# Altium PCB RheoBoard_V9.PcbDoc (part 1 of 2)
Units mm, origin at the board's own origin, x right, y up, seen from the top; angles counter-clockwise.
Board outline 100.09 x 99.96 mm, 2 copper layers (Top Layer, Bottom Layer), stack 1.58 mm thick; 125 components, 62 nets, 325 pads, 495 vias.
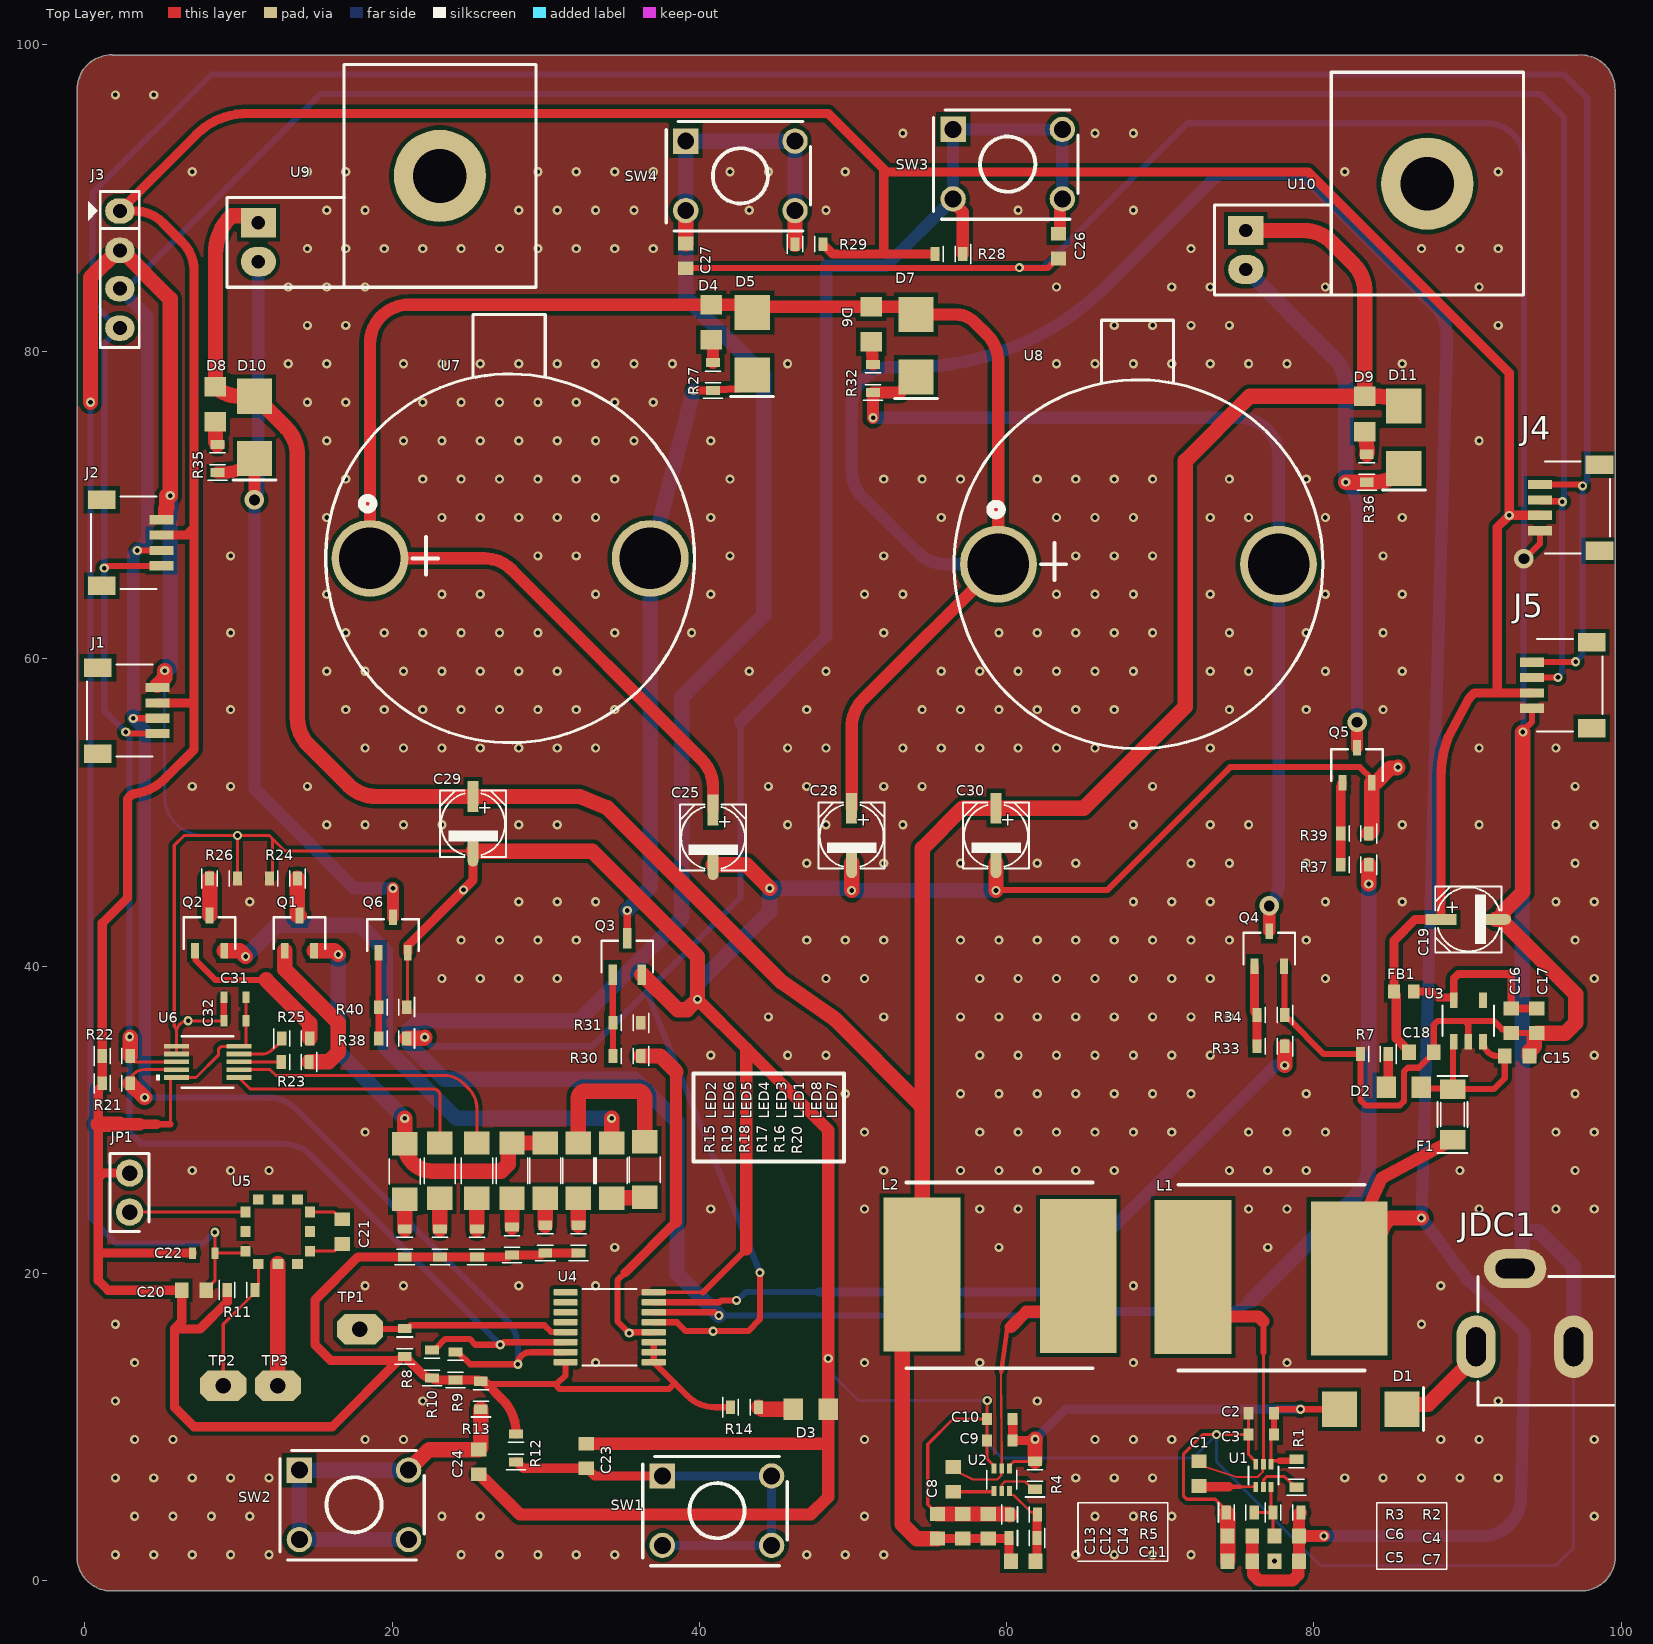
[diagram p0: Top Layer view]
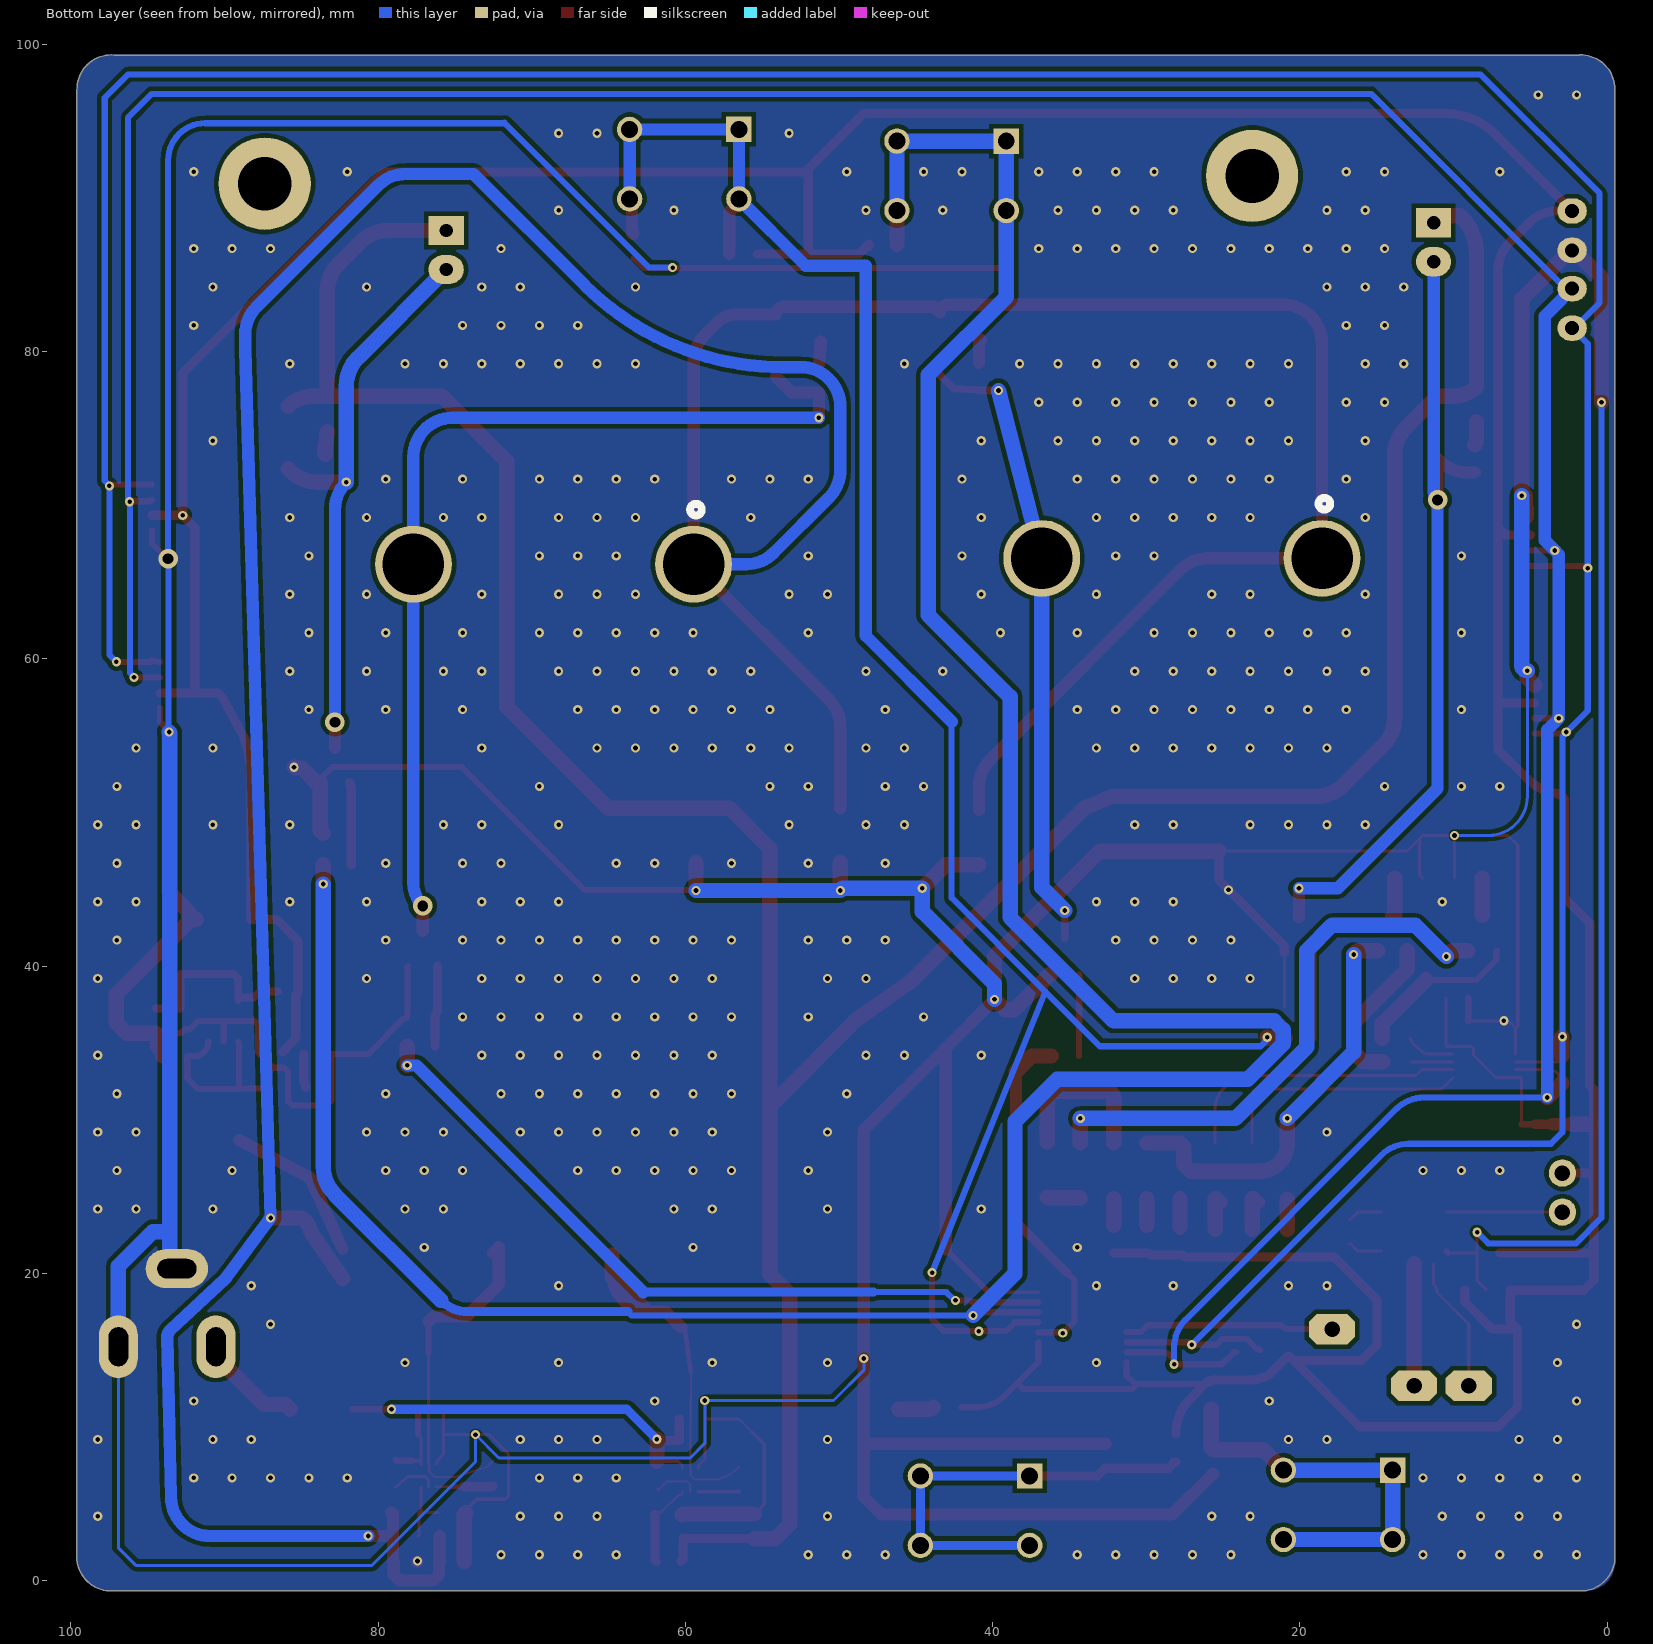
[diagram p1: Bottom Layer view, seen from below]
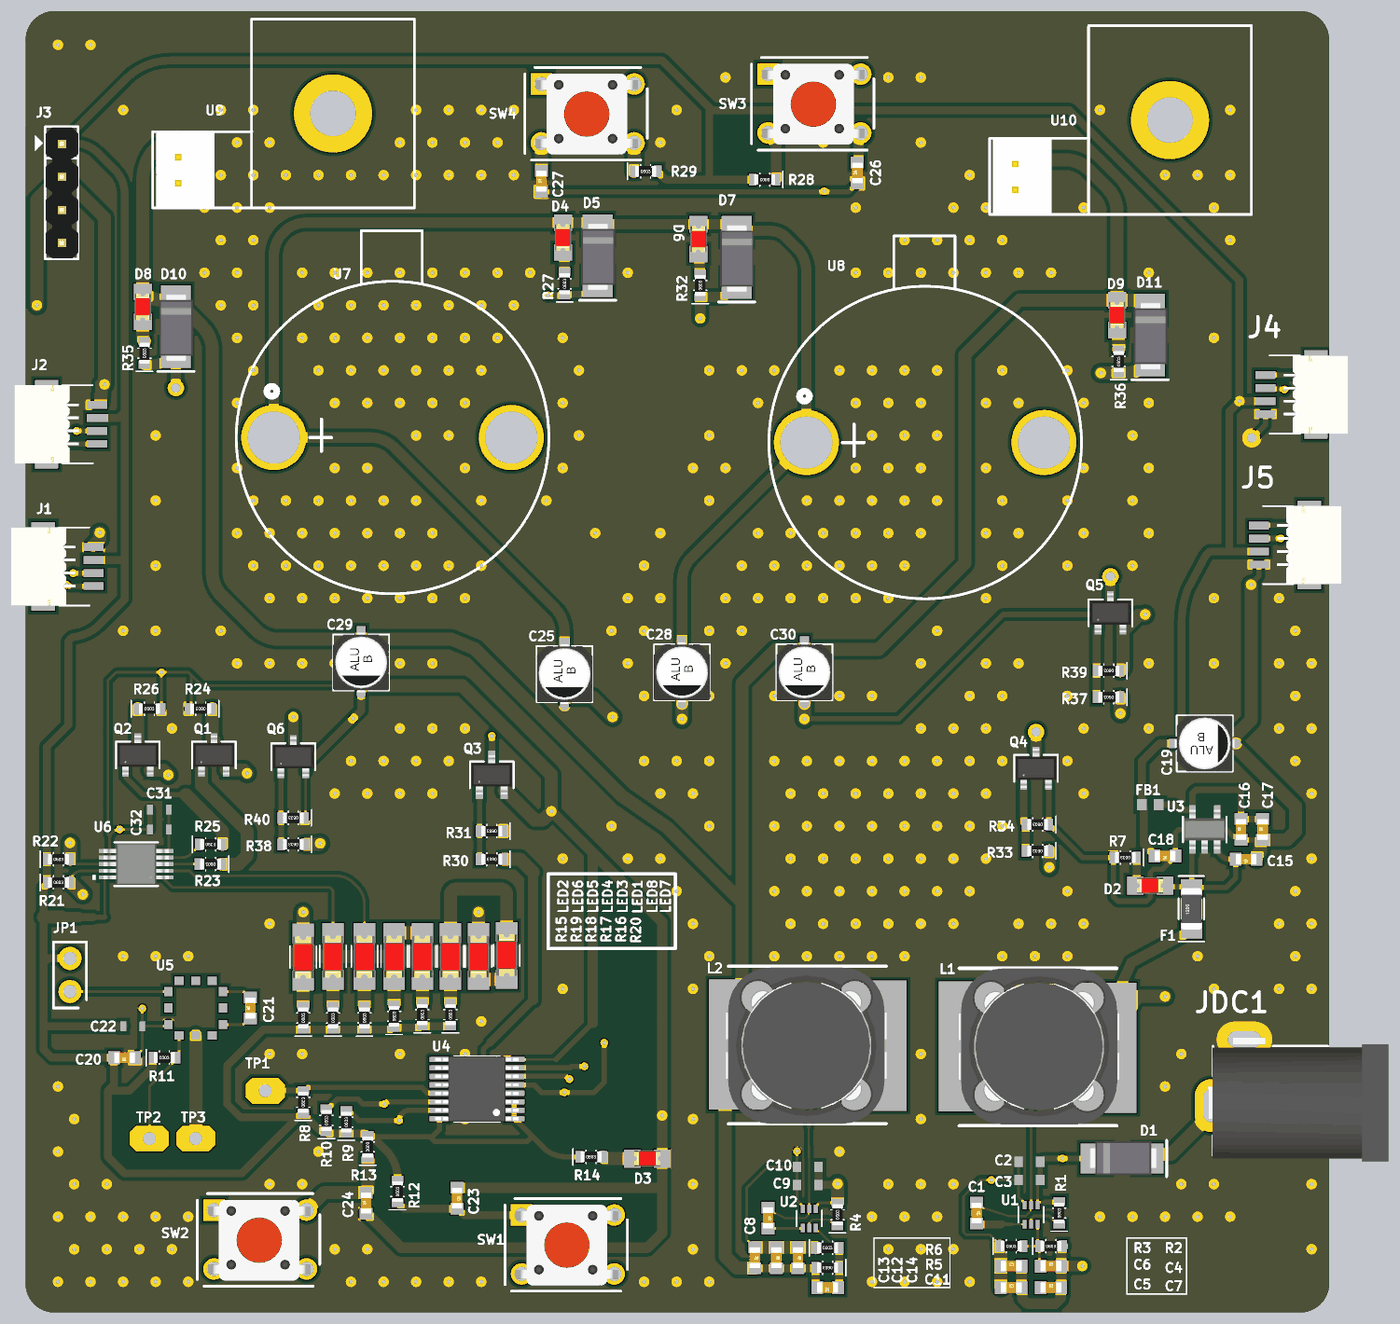
[diagram p3: 3D render of the assembled board from above, using the file's embedded part models]

## Layer stack, top to bottom
Top Solder: solder mask 0.01, SM-001, Dk 4
Top Layer: signal copper 0.035
Dielectric 1: dielectric 1.51, FR-4, Dk 4.8
Bottom Layer: signal copper 0.035
Bottom Solder: solder mask 0.01, SM-001, Dk 4

## Board outline
-0.491,1.639 -0.484,96.889 cw(c1.738,97.08) 1.802,99.309 1.809,99.302 97.172,99.302 cw(c97.362,97.08) 99.592,97.016 99.592,1.766 cw(c97.369,1.576) 97.306,-0.654 97.299,-0.647 1.929,-0.647 cw(c1.738,1.576)

## Design rules (kind name [scope] priority, off if disabled: settings)
BoardOutlineClearance [All] p1: gap=0 ignorepadtopadclearanceinfootprint=FALSE
Clearance "Stitching GND" [IsStitchingVia and InNet('GND') vs (IsVia and (Not IsStitchingVia)) Or IsPad] p1: gap=0.5 ignorepadtopadclearanceinfootprint=TRUE
Clearance Clearance_1 [All] p2: gap=0.23 ignorepadtopadclearanceinfootprint=TRUE
ComponentOrientations [All] p1: allowedrotations=1
Creepage [All] p1: checkdistance=0.254 applytopolygonpour=TRUE
HoleSize [All] p1: absolutevalues=TRUE maxlimit=10 minlimit=0.025 maxpercent=80.000 minpercent=20.000
HoleToHoleClearance [All] p1: gap=0.25 allowstackedmicrovias=TRUE
MinimumAnnularRing [All] p1: minimumring=0.1
MinimumSolderMaskSliver [All] p1: minsoldermaskwidth=0.1
NetsToIgnore [All] p1:
PermittedLayers [All] p1: toplayerpermitted=TRUE bottomlayerpermitted=TRUE
PolygonConnect [All] p1: connectstyle=Direct reliefconductorwidth=0.254 reliefentries=4 polygonreliefangle="90 Angle" airgapwidth=0.254
RoutingVias [All] p1: holewidth=0.3 width=0.6 viastyle="Through Hole" minholewidth=0.3 minwidth=0.6 maxholewidth=1.5 maxwidth=3
SilkToSilkClearance [All] p1: silktosilkclearance=0.15
SilkToSolderMaskClearance [IsPad] p1: minsilkscreentomaskgap=0.15 clearancetoexposedcopper=TRUE
SolderMaskExpansion [All] p1: expansion=0.102 istentingtop=FALSE
SupplyNets "Schematic Supply Nets" [InNet('6V')] p1: voltage=0.000
SupplyNets "Schematic Supply Nets_8" [InNet('VIN')] p2: voltage=0.000
SupplyNets "Schematic Supply Nets_7" [InNet('4V5')] p3: voltage=0.000
SupplyNets "Schematic Supply Nets_6" [InNet('4V5A')] p4: voltage=0.000
SupplyNets "Schematic Supply Nets_5" [InNet('3V3')] p5: voltage=0.000
SupplyNets "Schematic Supply Nets_4" [InNet('GND')] p6: voltage=0.000
SupplyNets "Schematic Supply Nets_3" [InNet('+12')] p7: voltage=0.000
SupplyNets "Schematic Supply Nets_1" [InNet('D3V3')] p8: voltage=0.000
Width [All] p1: maxlimit=1 minlimit=0.15 preferedwidth=0.2
25 further rules are at their usual default settings.

## Classes and differential pairs
component class U_POWER: 0.7 C1 C2 C3 C5 C6 C7 C8 C9 C10 C11 C12 C13 C14 C15 C16 C17 C18 C19 D1 D2 F1 FB1 JDC1 L1 L2 R1 R2 R3 R4 R5 R6 R7 U1 U2 U3
component class U_PERIPHERAL: C25 C26 C27 C28 C29 C30 D4 D5 D6 D7 D8 D9 D10 D11 Q3 Q4 Q5 Q6 R27 R28 R29 R30 R31 R32 R33 R34 R35 R36 R37 R38 R39 R40 SW3 SW4 U7 U8 U9 U10
component class U_MCU: C20 C21 C22 C23 C24 C31 C32 D3 J1 J2 J3 J4 J5 JP1 LED1 LED2 LED3 LED4 LED5 LED6 LED7 LED8 Q1 Q2 R8 R9 R10 R11 R12 R13 R14 R15 R16 R17 R18 R19 R20 R21 R22 R23 R24 R25 R26 SW1 SW2 TP1 TP2 TP3 U4 U5 U6

## Components (designator, comment, footprint, x,y, rotation, side; value= is the part's Value field where it differs from the comment)
C1 "100nF" CN-SMD-0603 72.517,6.985 r270 top value=100n
C2 "10uF" CAP_CL10_SAM 76.581,10.922 r0 top
C3 "10uF" CAP_CL10_SAM 76.581,9.525 r0 top value=10u
C4 "100nF" CN-SMD-0603 78.232,2.921 r0 top
C5 "22uF" CN-SMD-0603 75.184,1.27 r0 top value=22u
C6 "22uF" CN-SMD-0603 75.184,2.921 r0 top value=22u
C7 "22uF" CN-SMD-0603 78.232,1.27 r0 top value=22u
C8 "100nF" CN-SMD-0603 56.515,6.604 r270 top value=100n
C9 "10uF" CAP_CL10_SAM 59.563,9.144 r0 top value=10u
C10 "10uF" CAP_CL10_SAM 59.563,10.541 r0 top
C11 "100nF" CN-SMD-0603 61.087,1.27 r180 top value=100n
C12 "22uF" CN-SMD-0603 57.15,3.556 r270 top value=22u
C13 "22uF" CN-SMD-0603 55.499,3.556 r270 top value=22u
C14 "22uF" CN-SMD-0603 58.801,3.556 r270 top
C15 "10u" CN-SMD-0603 93.218,34.163 r180 top
C16 "100n" CN-SMD-0603 92.837,36.449 r90 top
C17 "10u" CN-SMD-0603 94.488,36.449 r90 top
C18 "10u" CN-SMD-0603 86.995,34.417 r180 top
C19 "CAP ALUM 100UF 20% 16V SMD" CAP-ALU-SMD-5.5x5.5 90.043,43.053 r0 top value=100uF
C20 "100nF" CN-SMD-0603 7.112,18.923 r180 top
C21 "1nF" CN-SMD-0603 16.764,22.733 r90 top
C22 "100nF" CAP_CL10_SAM-L 7.747,21.336 r180 top
C23 "100nF" CN-SMD-0603 32.639,8.128 r270 top
C24 "100nF" CN-SMD-0603 25.654,7.747 r90 top
C25 "CAP ALUM 100UF 20% 16V SMD" CAP-ALU-SMD-5.5x5.5 40.894,48.387 r270 top value="100u, 16v"
C26 "100nF" CN-SMD-0603 63.373,86.868 r90 top
C27 "100nF" CN-SMD-0603 39.116,86.233 r90 top
C28 "CAP ALUM 100UF 20% 16V SMD" CAP-ALU-SMD-5.5x5.5 49.911,48.514 r270 top value="100u, 16v"
C29 "CAP ALUM 100UF 20% 16V SMD" CAP-ALU-SMD-5.5x5.5 25.273,49.276 r270 top value="100u, 16v"
C30 "CAP ALUM 100UF 20% 16V SMD" CAP-ALU-SMD-5.5x5.5 59.309,48.514 r270 top value="100u, 16v"
C31 "1uF" CAP_CL10_SAM-L 9.779,37.973 r0 top
C32 "100nF" CAP_CL10_SAM-L 9.779,36.449 r0 top
D1 "SS34" DIO-SMD-106 83.693,11.176 r0 top
D2 "LED Red" LED-0805-Red 86.995,32.131 r180 top value="LED PWR"
D3 "LED Red" LED-0805-Red 46.101,11.176 r0 top
D4 "LED Red" LED-0805-Red 40.767,83.058 r270 top
D5 "SS34" DIO-SMD-106 43.434,80.518 r270 top
D6 "LED Red" LED-0805-Red 51.181,82.931 r270 top
D7 "SS34" DIO-SMD-106 54.102,80.391 r270 top
D8 "LED Red" LED-0805-Red 8.509,77.724 r270 top
D9 "LED Red" LED-0805-Red 83.312,77.089 r270 top
D10 "SS34" DIO-SMD-106 11.052,75.069 r270 top
D11 "SS34" DIO-SMD-106 85.852,74.422 r270 top
F1 "C1F5" RES-SMD-1206 89.027,30.353 r90 top
FB1 "330" IND_BLM18KG331WH1D_MUR-L 85.852,38.354 r180 top
J1 "PRT-14417" SPARKFUN_PRT-14417 2.286,56.642 r270 top
J2 "PRT-14417" SPARKFUN_PRT-14417 2.54,67.564 r270 top
J3 "Jumper 4" JP4 2.286,86.614 r270 top value=J3
J4 "PRT-14417" SPARKFUN_PRT-14417 97.155,69.85 r90 top
J5 "PRT-14417" SPARKFUN_PRT-14417 96.647,58.293 r90 top
JDC1 "Jac DC 5521" DC0 93.726,17.78 r180 top value="Jac DC"
JP1 "JP2" JP2-CLOSED 2.921,24.003 r180 top value="Connector 2"
L1 "4.7uH" Inductor_SMD 83.296,13.685 r90 top value=4.7u
L2 "2.2uH" Inductor_SMD 53.483,25.939 r270 top value=4.7u
LED1 "LED" LED-1206-Red 32.131,24.892 r90 top value="LED 3 ly Single Colour"
LED2 "LED" LED-1206-Red 20.828,24.841 r90 top value="LED 3 ly Single Colour"
LED3 "LED" LED-1206-Red 29.972,24.892 r90 top value="LED 3 ly Single Colour"
LED4 "LED" LED-1206-Red 27.813,24.892 r90 top value="LED 3 ly Single Colour"
LED5 "LED" LED-1206-Red 25.527,24.892 r90 top value="LED 3 ly Single Colour"
LED6 "LED" LED-1206-Red 23.114,24.892 r90 top value="LED 3 ly Single Colour"
LED7 "LED" LED-1206-Red 36.449,28.575 r270 top value="LED 3 ly Single Colour"
LED8 "LED" LED-1206-Red 34.29,24.892 r90 top value="LED 3 ly Single Colour"
Q1 "AO3400A" SOT-23-3L_AOS-L 13.97,42.164 r0 top
Q2 "AO3400A" SOT-23-3L_AOS-L 8.128,42.164 r0 top
Q3 "AO3400A" SOT-23-3L_AOS 35.306,40.64 r0 top
Q4 "AO3400A" SOT-23-3L_AOS-L 77.089,41.148 r0 top
Q5 "AO3400A" SOT-23-3L_AOS-L 82.804,53.086 r0 top
Q6 "AO3400A" SOT-23-3L_AOS-L 20.066,42.037 r0 top
R1 "RES 100K 5% 1/10W 0603" RES-SMD-0603 78.867,6.985 r90 top value=100K
R2 "197K" RES-SMD-0603 78.232,4.445 r0 top
R3 "30K" RES-SMD-0603 75.184,4.445 r0 top value=30k
R4 "RES 100K 5% 1/10W 0603" RES-SMD-0603 61.849,6.858 r90 top value=100K
R5 "270K" RES-SMD-0603 61.087,2.794 r180 top
R6 "30k" RES-SMD-0603 61.087,4.318 r0 top
R7 "1K" RES-SMD-0603 83.947,34.29 r180 top
R8 "2.2K" RES-SMD-0603 20.828,15.494 r90 top
R9 "4.7K" RES-SMD-0603 24.13,13.97 r90 top
R10 "4.7K" RES-SMD-0603 22.606,14.097 r90 top
R11 "10K" RES-SMD-0603 10.16,18.923 r0 top
R12 "10k" RES-SMD-0603 28.067,8.636 r90 top
R13 "10k" RES-SMD-0603 25.781,12.065 r90 top
R14 "1K" RES-SMD-0603 42.926,11.303 r0 top
R15 "1K" RES-SMD-0603 20.828,21.971 r90 top
R16 "1K" RES-SMD-0603 29.972,22.225 r90 top
R17 "1K" RES-SMD-0603 27.813,22.098 r90 top
R18 "1K" RES-SMD-0603 25.527,21.971 r90 top
R19 "1K" RES-SMD-0603 23.114,21.971 r90 top
R20 "1.2K" RES-SMD-0603 32.131,22.225 r90 top
R21 "10K" RES-SMD-0603 2.032,32.385 r0 top
R22 "10K" RES-SMD-0603 2.032,34.163 r0 top
R23 "100R" RES-SMD-0603 13.716,33.782 r180 top
R24 "100K" RES-SMD-0603 12.954,45.72 r180 top
R25 "100R" RES-SMD-0603 13.716,35.306 r0 top
R26 "100K" RES-SMD-0603 9.017,45.72 r0 top
R27 "RES 1K 5% 1/10W 0603" RES-SMD-0603 40.894,78.359 r90 top value=1K
R28 "10k" RES-SMD-0603 56.261,86.36 r180 top
R29 "10k" RES-SMD-0603 47.117,86.995 r0 top
R30 "RES 100R 5% 1/10W 0603" RES-SMD-0603 35.306,34.163 r180 top value=100R
R31 "RES 10K 5% 1/10W 0603" RES-SMD-0603 35.306,36.322 r180 top value=10K
R32 "RES 1K 5% 1/10W 0603" RES-SMD-0603 51.308,78.232 r90 top value=1K
R33 "RES 100R 5% 1/10W 0603" RES-SMD-0603 77.216,34.798 r180 top value=100R
R34 "RES 10K 5% 1/10W 0603" RES-SMD-0603 77.216,36.83 r180 top value=10K
R35 "RES 1K 5% 1/10W 0603" RES-SMD-0603 8.636,73.025 r90 top value=1K
R36 "RES 1K 5% 1/10W 0603" RES-SMD-0603 83.439,72.39 r90 top value=1K
R37 "RES 100R 5% 1/10W 0603" RES-SMD-0603 82.677,46.609 r180 top value=100R
R38 "RES 100R 5% 1/10W 0603" RES-SMD-0603 20.066,35.306 r180 top value=100R
R39 "RES 10K 5% 1/10W 0603" RES-SMD-0603 82.677,48.641 r180 top value=10K
R40 "RES 10K 5% 1/10W 0603" RES-SMD-0603 20.066,37.338 r180 top value=10K
SW1 "SW2" "BUTTON 4 PIN" 41.148,4.572 r0 top
SW2 "SW2" "BUTTON 4 PIN" 17.526,4.953 r0 top
SW3 "SW2" "BUTTON 4 PIN" 60.071,92.202 r0 top
SW4 "SW2" "BUTTON 4 PIN" 42.672,91.44 r0 top
TP1 "1" "TP - 2" 17.907,16.383 r0 top
TP2 "1" "TP - 2" 9.017,12.7 r0 top
TP3 "1" "TP - 2" 12.573,12.7 r0 top
U1 "TI TPS563203DRLR" SOT50P160X60-6N 76.708,6.858 r270 top
U2 "TI TPS563203DRLR" SOT50P160X60-6N 59.682,6.577 r270 top
U3 "AP2112K-3.3TRG1" SOT_RG1_DIO 90.043,36.449 r90 top value=1K
U4 "TCA9534APWR" SOP65P640X120-16N 34.163,16.51 r180 top
U5 "MPRLS0025PA00001A" XDCR_MPRLS0025PA00001A 12.573,22.733 r0 top
U6 "PCA9632DP2,118" TSSOP10_3P1X3P1_NXP 8.001,33.782 r180 top
U7 "PUMP" Pump 27.686,66.421 r0 top
U8 "PUMP" Pump 68.58,66.04 r0 top
U9 "VALVE" VALVE 23.114,91.44 r0 top
U10 "VALVE2" VALVE 87.376,90.932 r0 top

## Footprints (in the part's own frame and the unit in brackets; to place one, negate y for a bottom-side part, rotate by r counter-clockwise, add the part's x,y. Pads: shape width x height; smd on the part's side, far side on the other; paste and mask are expansions set on the pad)
"BUTTON 4 PIN" [mil] "BUTTON SMORE 280mil x 178mil"
  rect 65x65 hole 43.31: 1(-140,89)
  round 65 hole 43.31: 1(140,89) 2(-140,-89) 2(140,-89)
  silkscreen extent -190,-141 180,139, body extent -159,-124 153,120, height 276
CAP-ALU-SMD-5.5x5.5 [mm]
  rect 2x0.7 smd: 1(-1.778,0)
  oval 2x0.7 smd: 2(1.778,0)
  silkscreen extent -2.15,-2.15 2.15,2.15, body extent -2.3,-2.15 2.3,2.15, height 5.4
CAP_CL10_SAM [mm]
  rect 0.656x0.8 smd paste+0 mask+0: 1(-0.828,0) 2(0.828,0)
CAP_CL10_SAM-L [mm]
  rect 0.452x0.749 smd paste+0 mask+0: 1(-0.726,0) 2(0.726,0)
CN-SMD-0603 [mm]
  rect 0.9x1 smd: 1(-0.8,0) 2(0.8,0)
  body extent -0.8,-0.4 0.8,0.4, height 0.3
DC0 [mil] "Jac DC input"
  oval 100x160 hole 50 slot 100 at 90 deg: 1(125,100) 2(-125,100)
  oval 160x100 hole 50 slot 100 at 0 deg: 3(25,-100)
  silkscreen extent -227,-80 120,250, body extent -410,-105 134,269, height 434
DIO-SMD-106 [mil]
  rect 90x90.55 smd: 1(80,0) 2(-80,0)
  silkscreen extent 135,-55 135,55, body extent -99,-50 106,52, height 95
IND_BLM18KG331WH1D_MUR-L [mm]
  rect 0.76x0.89 smd paste+0 mask+0: 1(-0.647,0) 2(0.647,0)
Inductor_SMD [mm]
  rect 10x5 smd: 1(6.096,11.176) 2(6,1)
  silkscreen extent 0,0 12.1,12.1, body extent 0.1,-0.2 12.1,12.14, height 7.15
JP2-CLOSED [mil]
  round 70 hole 40: 1(0,0) 2(0,-100)
  silkscreen extent -50,-150 50,50, body extent -50,-152 50,50, height 300
JP4 [mil] "Jumper 4"
  oval 65x75 hole 36: 1(-100,0) 2(1,0) 3(99,0) 4(200,0)
  silkscreen extent -150,-81 250,50, body extent -148,-48 248,50, height 323
LED-0805-Red [mil]
  rect 50x55 smd: 1(0,0) 2(90,0)
  body extent 5,-25 85,25, height 43
LED-1206-Red [mil]
  rect 60x65 smd: 1(0,0) 2(142,0)
  silkscreen extent 38,-40 104,40, body extent 7,-31 133,32, height 43
Pump [mm]
  round 5 hole 4: 1(-9.12,0.127) 2(9.12,0.127)
  silkscreen extent -12,-11.87 12,16
RES-SMD-0603 [mm]
  rect 0.6x0.9 smd: 1(-0.889,0) 2(0.927,0)
  silkscreen extent -1.4,-0.64 0.38,0.63, body extent -0.8,-0.4 0.8,0.4, height 0.43
RES-SMD-1206 [mil]
  rect 50x65 smd: 1(-65,0) 2(65,0)
  silkscreen extent -99,-38 99,39, body extent -63,-31 63,32, height 40
SOP65P640X120-16N [mm]
  rrect25% 1.57x0.41 smd: 1(-2.87,2.275) 2(-2.87,1.625) 3(-2.87,0.975) 4(-2.87,0.325) 5(-2.87,-0.325) 6(-2.87,-0.975) 7(-2.87,-1.625) 8(-2.87,-2.275) 9(2.87,-2.275) 10(2.87,-1.625) 11(2.87,-0.975) 12(2.87,-0.325) 13(2.87,0.325) 14(2.87,0.975) 15(2.87,1.625) 16(2.87,2.275)
  silkscreen extent -1.77,-2.5 1.77,2.5, body extent -3.2,-2.5 3.2,2.5, height 1.2
SOT50P160X60-6N [mm]
  rect 0.66x0.31 smd: 1(-0.735,0.5) 2(-0.735,0) 3(-0.735,-0.5) 4(0.735,-0.5) 5(0.735,0) 6(0.735,0.5)
  silkscreen extent -0.6,-0.97 0.6,0.97
SOT-23-3L_AOS [mil]
  rect 22x52 smd paste+0 mask+0: 1(-37.5,-47) 2(37.5,-47) 3(0,47)
  silkscreen extent -66,-40 66,40, body extent -61,-59 61,59, height 49
SOT-23-3L_AOS-L [mil]
  rect 20x40 smd paste+0 mask+0: 1(-37.5,-45) 2(37.5,-45) 3(0,45)
  silkscreen extent -66,-40 66,40, body extent -61,-59 61,59, height 49
SOT_RG1_DIO [mil]
  rect 39.5x20 smd paste+0 mask+0: 1(-53.25,37.4) 2(-53.25,0) 3(-53.25,-37.4) 4(53.25,-37.4) 5(53.25,37.4)
  silkscreen extent -39,-66 39,66, body extent -59,-61 59,61, height 51
SPARKFUN_PRT-14417 [mm]
  rect 0.6x1.55 smd: 1(-1.5,2.45) 2(-0.5,2.45) 3(0.5,2.45) 4(1.5,2.45)
  rect 1.2x1.8 smd: S1(-2.8,-1.425) S2(2.8,-1.425)
  silkscreen extent -3,-2.12 3,2.12, body extent -3,-3.9 3,1.05, height 3.25
"TP - 2" [mm] "TestPoint"
  oct 3x2 hole 1: 1(0,0)
TSSOP10_3P1X3P1_NXP [mil]
  rect 64.56x12 smd paste+0 mask+0: 1(-80,40) 2(-80,20) 3(-80,0) 4(-80,-20) 5(-80,-40) 6(80,-40) 7(80,-20) 8(80,0) 9(80,20) 10(80,40)
  silkscreen extent -66,-66 132,66, body extent -99,-61 99,61, height 43
VALVE [mil]
  rect 90x75 hole 34: 1(-465,-120)
  oval 90x75 hole 34: 2(-465,-220)
  round 236.22 hole 137.8 unplated: 3(0,0)
  silkscreen extent -545,-285 246,285, body extent -535,-288 -358,-52, height 236
XDCR_MPRLS0025PA00001A [mm]
  rect 0.7x0.65 smd: 1(-1.27,2.1) 2(0,2.1) 3(1.27,2.1) 7(1.27,-2.1) 8(0,-2.1) 9(-1.27,-2.1)
  rect 0.65x0.7 smd: 4(2.1,1.27) 5(2.1,0) 6(2.1,-1.27) 10(-2.1,-1.27) 11(-2.1,0) 12(-2.1,1.27)

## Part data
C1 C8: library part "CAPCER0001 100nF 10% 50V X7R 0603 SMD_1", "CAP CER 100nF 10% 50V X7R 0603 SMD", CERTIFICATION=NA, CLASS=B, ComponentLink1Description=Datasheet, ComponentLink1URL=https://datasheet.lcsc.com/lcsc/1811021431_Samsung-Electro-Mechanics-CL10B104KB8NNNC_C1591.pdf, LINE=SMT, MOUNT=SMD, TMG CODE=None, TMG PN=CAPCER0001, TYPE=EP, UNIT=PCS
C2 C3 C9 C10: library part CL10A106MQ8NNNC, "Description", Manufacturer_Name=Samsung, Copyright="Copyright (C) 2026 Ultra Librarian. All rights reserved.", Manufacturer_Part_Number=CL10A106MQ8NNNC
C4 C11 C20 C22 C23 C24 C26 C27 C31 C32: library part "CAPCER0001 100nF 10% 50V X7R 0603 SMD", "CAP CER 100nF 10% 50V X7R 0603 SMD", CERTIFICATION=NA, CLASS=B, ComponentLink1Description=Datasheet, ComponentLink1URL=https://datasheet.lcsc.com/lcsc/1811021431_Samsung-Electro-Mechanics-CL10B104KB8NNNC_C1591.pdf, LINE=SMT, MOUNT=SMD, TMG CODE=None, TMG PN=CAPCER0001, TYPE=EP, UNIT=PCS
C5 C6 C7 C12 C13 C14: library part GRM188R60J226MEA0D, "Description", Manufacturer_Name=Murata, Copyright="Copyright (C) 2026 Ultra Librarian. All rights reserved.", Manufacturer_Part_Number=GRM188R60J226MEA0D
C15 C17 C18: library part GMC10X7R106K10NT, "CAP0603 X7R 10UF 10% 10V", Capacitance="10 µF", Device Package="0603 (1608 Metric)", Manufacturer="Cal-Chip Electronics, Inc.", Operating Temperature="-55°C ~ 125°C", Supplier Part Number 1=4713-GMC10X7R106K10NTCT-ND, Temperature Coefficient=X7R, Tolerance=±10%, Voltage - Rated=10V, Applications="General Purpose", ComponentLink1Description=Datasheet, ComponentLink1URL=https://88ce57.p3cdn1.secureserver.net/wp-content/uploads/2023/01/gmc_series-2.pdf, ComponentLink2Description="DigiKey Link", ComponentLink2URL=https://www.digikey.com/en/products/detail/cal-chip-electronics-inc/GMC10X7R106K10NT/18151126, lastupdated="2/9/2024 8:09:39 PM", Lifecycle Status=Active, Minimum Order=1, Mounting Type="Surface Mount, MLCC", Package / Case="0603 (1608 Metric)", Packaging=TapeAndReel, Part Number=GMC10X7R106K10NT, Part Status=Active, partid=49835, price=0.26, series=GMC, Size / Dimension="0.063\" L x 0.031\" W (1.60mm x 0.80mm)", Supplier 1=DigiKey, Thickness (Max)="0.039\" (1.00mm)"
C16: library part GMC10X7R106K10NT, "CAP0603 X7R 100nF 10% 10V", Capacitance="10 µF", Device Package="0603 (1608 Metric)", Manufacturer="Cal-Chip Electronics, Inc.", Operating Temperature="-55°C ~ 125°C", Supplier Part Number 1=4713-GMC10X7R106K10NTCT-ND, Temperature Coefficient=X7R, Tolerance=±10%, Voltage - Rated=10V, Applications="General Purpose", ComponentLink1Description=Datasheet, ComponentLink1URL=https://88ce57.p3cdn1.secureserver.net/wp-content/uploads/2023/01/gmc_series-2.pdf, ComponentLink2Description="DigiKey Link", ComponentLink2URL=https://www.digikey.com/en/products/detail/cal-chip-electronics-inc/GMC10X7R106K10NT/18151126, lastupdated="2/9/2024 8:09:39 PM", Lifecycle Status=Active, Minimum Order=1, Mounting Type="Surface Mount, MLCC", Package / Case="0603 (1608 Metric)", Packaging=TapeAndReel, Part Number=GMC10X7R106K10NT, Part Status=Active, partid=49835, price=0.26, series=GMC, Size / Dimension="0.063\" L x 0.031\" W (1.60mm x 0.80mm)", Supplier 1=DigiKey, Thickness (Max)="0.039\" (1.00mm)"
C19: library part UWT1C101MCL1GB, "CAP ALUM 100UF 20%  / 16V SMD", Supplier Part Number 1=493-2177-2-ND, Supplier 1=Digi-Key
C21: library part GCJ188R71H102KA01D, "No Description Available", Manufacturer_Name=Murata, Copyright="Copyright (C) 2026 Ultra Librarian. All rights reserved.", Manufacturer_Part_Number=GCJ188R71H102KA01D, TYPE="Ceramic Capacitors"
C25 C28 C29 C30: library part UWT1C101MCL1GB, Supplier Part Number 1=493-2177-2-ND, Supplier 1=Digi-Key
D1 D5 D7 D10 D11: "Schottky Diode 40V 3A SMA", Supplier Part Number 1=SS34-E3/57TGICT-ND, Supplier 1=Digi-Key
D2 D3 D4 D6 D8 D9: library part LTST-C190KRKT, "Lite-On LED Red 0603", Supplier Part Number 1=160-1436-1-ND, Supplier 1=Digi-Key, Supplier Part Number 2=FL1413
F1: "Fuse Chip Fast Acting 5A 125V SMD Solder Pad 1206 3.2 X 1.58 X 0.63mm", Case Code (Imperial)=1206, Case Code (Metric)=3216, DC Cold Resistance=20mR, Manufacturer="Bel TRP", Max Operating Temperature=125°C, Min Operating Temperature=-55°C, Supplier Part Number 1=48AC8480, Voltage Rating=125V, Voltage Rating (DC)=63V, Case/Package=1206, Category=Uncategorized, ComponentLink1Description=http://www.mouser.com/ds/2/643/C1F-594910.pdf?src-supplier=Mouser, ComponentLink1URL=http://www.mouser.com/ds/2/643/C1F-594910.pdf?src-supplier=Mouser, ComponentLink2Description=http://belfuse.com/pdfs/C1F.pdf?src-supplier=Avnet, ComponentLink2URL=http://belfuse.com/pdfs/C1F.pdf?src-supplier=Avnet, ComponentLink3Description=https://belfuse.com/resources/datasheets/circuitprotection/ds-cp-c1f-series.pdf?src-supplier=Digikey, ComponentLink3URL=https://belfuse.com/resources/datasheets/circuitprotection/ds-cp-c1f-series.pdf?src-supplier=Digikey, Contact Plating=Tin, Fuse Type="Board Mount (Cartridge Style Excluded)", Manufacturer Part Number=C1F5, MOUNT="Surface Mount", Number of Pins=2, Packaging="Cut Tape", RoHS=Yes, series=C1F, Supplier 1=Newark, Voltage Rating (AC)=125V
FB1: library part BLM18KG331SH1D, "FERRITE BEAD 330 OHM 0603 1LN", Current Rating (Max)=1.7A, DC Resistance (DCR) (Max)=80mOhm, Device Package="0603 (1608 Metric)", Impedance @ Frequency="330 Ohms @ 100 MHz", Manufacturer="Murata Electronics", Operating Temperature="-55°C ~ 125°C", Ratings=AEC-Q200, Supplier Part Number 1=490-13257-1-ND, ComponentLink1Description=Datasheet, ComponentLink1URL=https://www.murata.com/en-global/products/productdata/8796737273886/QNFA9101.pdf, ComponentLink2Description="DigiKey Link", ComponentLink2URL=https://www.digikey.com/en/products/detail/murata-electronics/BLM18KG331SH1D/5881246, Filter Type="Power Line", Height (Max)="0.037\" (0.95mm)", lastupdated="3/11/2024 7:43:28 AM", Lifecycle Status=Active, Minimum Order=1, Mounting Type="Surface Mount", Number of Lines=1, Package / Case="0603 (1608 Metric)", Packaging=TapeAndReel, Part Number=BLM18KG331SH1D, Part Status=Active, partid=932, price=0.02, series="EMIFIL®, BLM18", Size / Dimension="0.063\" L x 0.032\" W (1.60mm x 0.80mm)", Supplier 1=DigiKey
J1 J2 J4 J5: "QWIIC JST CONNECTOR - SMD 4-PIN", Package=None, Check_prices=https://www.snapeda.com/parts/PRT-14417/SparkFun+Electronics/view-part/?ref=eda, MF="SparkFun Electronics", MP=PRT-14417, SnapEDA_Link=https://www.snapeda.com/parts/PRT-14417/SparkFun+Electronics/view-part/?ref=snap
J3: library part JP4, "Jumper 3"
JDC1: library part DCIN, "Jac DC input"
JP1: library part Con2, "jumper 2.0 B"
L1 L2: library part "INDMOI0016 1W2T 2.2uH 20% 5A 0420 SMD", "IND MOI 1W2T 4.7uH 20% 5A 0420 SMD", CERTIFICATION=NA, CLASS=B, ComponentLink1Description=Datasheet, ComponentLink1URL=https://datasheet.lcsc.com/lcsc/2305161117_cjiang--Changjiang-Microelectronics-Tech-FXL0420-2R2-M_C167206.pdf, LINE=SMT, MOUNT=SMD, TMG CODE=None, TYPE=EP, UNIT=PCS
LED1 LED2 LED3 LED4 LED5 LED6 LED7 LED8: "LED Single colour Green and Red"
Q1 Q2 Q3 Q4 Q5 Q6: library part IRFML8244TRPBF, "MOSFET N-CH 25V 5.8A SOT23", Supplier Part Number 1=IRFML8244TRPBFCT-ND, Supplier 1=Digi-Key
R1 R4: library part RC0603JR-07100KL, "Yageo RES 100K 5% 1/10W 0603", Supplier Part Number 1=311-100KGRCT-ND, Supplier 1=Digi-Key, Supplier Part Number 2=FL2402
R2 R3 R5 R6: library part "RESCHP0195 2K7 1% 0603 SMD", "RES CHP 2K7 1% 1/10W 0603 SMD", CERTIFICATION=NA, CLASS=B, ComponentLink1Description=Datasheet, ComponentLink1URL=https://datasheet.lcsc.com/lcsc/2304140030_YAGEO-RC0603FR-072K7L_C114612.pdf, LINE=SMT, MOUNT=SMD, TMG CODE=None, TMG PN=RESCHP0195, TYPE=EP, UNIT=PCS
R7: library part "Resistor 2.2K", "Res Thick Film 0603 2.2K Ohm 5% 1/10W ±200ppm/°C Molded SMD SMD Paper T/R", Case Code (Imperial)=0603, Case Code (Metric)=1608, Manufacturer=Vishay, Manufacturer Part Number=CRCW06032K20JNEA, Max Operating Temperature=155°C, Max Power Dissipation=100mW, Min Operating Temperature=-55°C, Package Quantity=5000, Ratings=AEC-Q200, Resistance=2.2kR, Resistance Tolerance=5%, Resistor Type="Thick Film", Temperature Coefficient=200ppm/°C, Voltage Rating=75V, Case/Package=0603, Category="Chip SMD Resistors", ComponentLink1Description=https://datasheet.ciiva.com/2462/dcrcwe3-2462048.pdf?src-supplier=Digikey, ComponentLink1URL=https://datasheet.ciiva.com/2462/dcrcwe3-2462048.pdf?src-supplier=Digikey, ComponentLink2Description=https://datasheet.ciiva.com/16767/70201119-16767464.pdf?src-supplier=Allied+Electronics, ComponentLink2URL=https://datasheet.ciiva.com/16767/70201119-16767464.pdf?src-supplier=Allied+Electronics, ComponentLink3Description=https://datasheet.ciiva.com/2462/dcrcwe3-2462046.pdf?src-supplier=Digikey, ComponentLink3URL=https://datasheet.ciiva.com/2462/dcrcwe3-2462046.pdf?src-supplier=Digikey, ComponentLink4Description=https://datasheet.ciiva.com/5541/dcrcwe3-109170-5541959.pdf?src-supplier=Mouser, ComponentLink4URL=https://datasheet.ciiva.com/5541/dcrcwe3-109170-5541959.pdf?src-supplier=Mouser, ComponentLink5Description=https://datasheet.ciiva.com/16286/dcrcwe3-16286997.pdf?src-supplier=Future+Electronics, ComponentLink5URL=https://datasheet.ciiva.com/16286/dcrcwe3-16286997.pdf?src-supplier=Future+Electronics, Construction=Rectangular, Contact Plating=Tin, Depth=0.85mm, Features="Automotive AEC-Q200", Height=0.45mm, Lead Free=5697LeadFree, Length=1.55mm, Military Standard=Not, Number of Terminations=2, Packaging="Tape and Reel", Power Rating=100mW, Pricing 1="5000=0.0053 (USD)", Radiation Hardening=No, Reach SVHC Compliant=Unknown, RoHS=Yes, RoHS Compliant=Yes, series=CRCW, Size Code=0603, Stock 1=130000, Supplier 1="Arrow Electronics", Supplier Part Number 1=CRCW06032K20JNEA, Termination=SMD/SMT, Tolerance=5%, Weight=7.1E-05oz, Width=0.85mm
R8 R9 R10 R11 R12 R13 R14 R28 R29: library part "RESCHP0428 8K4 1% 0603 SMD", "RES CHP 8K4 1% 1/10W 0603 SMD", CERTIFICATION=NA, CLASS=B, ComponentLink1Description=Datasheet, ComponentLink1URL=https://datasheet.lcsc.com/lcsc/2304140030_YAGEO-RT0603FRD07100RL_C160603.pdf, LINE=SMT, MOUNT=SMD, TMG CODE=None, TYPE=EP, UNIT=PCS
R15 R16 R17 R18 R19 R20 R21 R22 R23 R24 R25 R26: library part Res-SMD, "Resistor", Manufacturer="Generic Components", CLASS=Passive, Published=08/06/2000, Publisher="Altium Hobart Technology Centre"
R27 R32 R35 R36: library part RC0603JR-071KL, "Yageo RES 1K 5% 1/10W 0603", Supplier Part Number 1=C131707, Supplier 1=LCSC
R30 R33 R37 R38: library part RC0603JR-07100RL, "Yageo RES 100R 5% 1/10W 0603", Supplier Part Number 1=311-100GRCT-ND, Supplier 1=Digi-Key, Supplier Part Number 2=FL2438
R31 R34 R39 R40: library part RC0603JR-0710KL, "Yageo RES 10K 5% 1/10W 0603", Supplier Part Number 1=311-10KGRCT-ND, Supplier 1=Digi-Key, Supplier Part Number 2=FL2403
SW1 SW2 SW3 SW4: "Switch button 4 pin"
TP1 TP2 TP3: library part TP, "CONNECT 1"
U1 U2: library part "ICSOCV0021 BCK TPS563201 3A SOT23-6 SMD", "ICS OCV BCK TPS563201 3A SOT23-6 SMD", CERTIFICATION=NA, CLASS=B, ComponentLink1Description=Datasheet, ComponentLink1URL=https://datasheet.lcsc.com/lcsc/2304241919_Texas-Instruments-TPS563201DDCR_C116592.pdf, LINE=SMT, MOUNT=SMD, TMG CODE=None, TYPE=EP, UNIT=PCS
U3: "AP2112 Series 0.6 A 3.3 V Fixed Output SMT LDO Linear Regulator - SOT23-5", Package="SOT-753 Diodes Inc.", Availability=Unavailable, MF="Diodes Inc.", MP=AP2112K-3.3TRG1, price=None, SnapEDA_Link=https://www.snapeda.com/parts/AP2112K-3.3TRG1/Diodes%20Inc./view-part/?ref=snap
U4: "8-bit 1.65- to 5.5-V I2C/SMBus I/O expander with interrupt, & config registers", Package="TSSOP-16 Texas Instruments", Check_prices=https://www.snapeda.com/parts/TCA9534APWR/Texas+Instruments/view-part/?ref=eda, MF="Texas Instruments", MP=TCA9534APWR, SnapEDA_Link=https://www.snapeda.com/parts/TCA9534APWR/Texas+Instruments/view-part/?ref=snap
U5: "Pressure Sensor 25PSI _172.37kPa_ Absolute Male - 0.1 _2.5mm_ Tube 24 b 12-SMD Module", Package="SMD-10 Honeywell", Digi-Key_Part_Number=480-7098-1-ND, MF="Honeywell Sensing", MP=MPRLS0025PA00001A, SnapEDA_Link=https://www.snapeda.com/parts/MPRLS0025PA00001A/Honeywell%20Sensing%20and%20Productivity%20Solutions/view-part/2772767/?ref=snap
U6: "No Description Available", Manufacturer_Name=NXP, Copyright="Copyright (C) 2026 Ultra Librarian. All rights reserved.", Manufacturer_Part_Number=PCA9632DP2,118, RefDes=RefDes, TYPE=Type
U7 U8 U9 U10: library part A5F083, "Connector Header 2 Position 6.35mm Solder Straight Thru-Hole 2 Terminal 1 Port MLX-Series", Color=Natural, Contact Resistance=3.5mΩ, Current Rating=13.5A, Dielectric Material=Polyester, Flammability Rating="UL94 V-2", Insulation Resistance=1GΩ, Manufacturer=Molex, Manufacturer Lifecycle Status=ACTIVE, Manufacturer Part Number=10-84-4022, Max Operating Temperature=105°C, Min Operating Temperature=-55°C, Operating Force=6.672N, Supplier Part Number 1=0010844022, Voltage Rating=600V, Category="Headers and Wire Housings", China RoHS=Compliant, ComponentLink1Description=https://datasheet.octopart.com:443/10-84-4022-Molex-datasheet-137053637.pdf?src-supplier=element14+APAC, ComponentLink1URL=https://datasheet.octopart.com:443/10-84-4022-Molex-datasheet-137053637.pdf?src-supplier=element14+APAC, ComponentLink2Description=https://datasheet.octopart.com:443/10-84-4022-Molex-datasheet-13791970.pdf?src-supplier=Molex, ComponentLink2URL=https://datasheet.octopart.com:443/10-84-4022-Molex-datasheet-13791970.pdf?src-supplier=Molex, ComponentLink3Description=https://sigma.octopart.com:443/16272272/technical_drawing/Molex-10-84-4022.pdf?src-supplier=Molex, ComponentLink3URL=https://sigma.octopart.com:443/16272272/technical_drawing/Molex-10-84-4022.pdf?src-supplier=Molex, ComponentLink4Description=https://datasheet.octopart.com:443/010844022-Molex-datasheet-5390850.pdf?src-supplier=Molex, ComponentLink4URL=https://datasheet.octopart.com:443/010844022-Molex-datasheet-5390850.pdf?src-supplier=Molex, ComponentLink5Description=https://datasheet.octopart.com:443/10-84-4022-Molex-datasheet-154742841.pdf?src-supplier=Master+Electronics, ComponentLink5URL=https://datasheet.octopart.com:443/10-84-4022-Molex-datasheet-154742841.pdf?src-supplier=Master+Electronics, ComponentLink6Description=https://datasheet.octopart.com:443/10-84-4022-Molex-datasheet-33343972.pdf?src-supplier=Electro+Sonic, ComponentLink6URL=https://datasheet.octopart.com:443/10-84-4022-Molex-datasheet-33343972.pdf?src-supplier=Electro+Sonic, ComponentLink7Description=https://datasheet.octopart.com:443/10-84-4022-Molex-datasheet-21205596.pdf?src-supplier=Electro+Sonic, ComponentLink7URL=https://datasheet.octopart.com:443/10-84-4022-Molex-datasheet-21205596.pdf?src-supplier=Electro+Sonic, ComponentLink8Description=https://datasheet.octopart.com:443/10-84-4022-Molex-datasheet-62102692.pdf?src-supplier=Electro+Sonic, ComponentLink8URL=https://datasheet.octopart.com:443/10-84-4022-Molex-datasheet-62102692.pdf?src-supplier=Electro+Sonic, ComponentLink9Description=https://datasheet.octopart.com:443/10-84-4022-Molex-datasheet-140174504.pdf?src-supplier=RS+(Formerly+Allied+Electronics), ComponentLink9URL=https://datasheet.octopart.com:443/10-84-4022-Molex-datasheet-140174504.pdf?src-supplier=RS+(Formerly+Allied+Electronics), ComponentLink10Description=https://datasheet.octopart.com:443/10-84-4022-Molex-datasheet-120134962.pdf?src-supplier=RS+(Formerly+Allied+Electronics), ComponentLink10URL=https://datasheet.octopart.com:443/10-84-4022-Molex-datasheet-120134962.pdf?src-supplier=RS+(Formerly+Allied+Electronics), ComponentLink11Description=https://datasheet.octopart.com:443/10-84-4022-Molex-datasheet-32867450.pdf?src-supplier=Newark, ComponentLink11URL=https://datasheet.octopart.com:443/10-84-4022-Molex-datasheet-32867450.pdf?src-supplier=Newark, ComponentLink12Description=https://datasheet.octopart.com:443/10844022-Molex-datasheet-8320017.pdf?src-supplier=Jameco, ComponentLink12URL=https://datasheet.octopart.com:443/10844022-Molex-datasheet-8320017.pdf?src-supplier=Jameco, ComponentLink13Description=https://datasheet.octopart.com:443/10-84-4022-Molex-datasheet-5314522.pdf?src-supplier=Verical, ComponentLink13URL=https://datasheet.octopart.com:443/10-84-4022-Molex-datasheet-5314522.pdf?src-supplier=Verical, ComponentLink14Description=https://datasheet.octopart.com:443/10-84-4022-Molex-datasheet-27226.pdf?src-supplier=DigiKey, ComponentLink14URL=https://datasheet.octopart.com:443/10-84-4022-Molex-datasheet-27226.pdf?src-supplier=DigiKey, ComponentLink15Description=http://sigma.octopart.com:80/16272275/rohs_statement/Molex-10-84-4022.pdf?src-supplier=Compliance+Statements, ComponentLink15URL=http://sigma.octopart.com:80/16272275/rohs_statement/Molex-10-84-4022.pdf?src-supplier=Compliance+Statements, ComponentLink16Description=http://sigma.octopart.com:80/reach_statement/Molex-company-74.pdf?src-supplier=Compliance+Statements, ComponentLink16URL=http://sigma.octopart.com:80/reach_statement/Molex-company-74.pdf?src-supplier=Compliance+Statements, ComponentLink17Description=http://sigma.octopart.com:80/rohs_statement/Molex-company-73.pdf?src-supplier=Compliance+Statements, ComponentLink17URL=http://sigma.octopart.com:80/rohs_statement/Molex-company-73.pdf?src-supplier=Compliance+Statements, ComponentLink18Description=http://sigma.octopart.com:80/conflict_mineral_statement/Molex-company-72.pdf?src-supplier=Compliance+Statements, ComponentLink18URL=http://sigma.octopart.com:80/conflict_mineral_statement/Molex-company-72.pdf?src-supplier=Compliance+Statements, Connector Type=Power, Contact Gender=Female, Contact Material=Bronze, Contact Plating=Tin, Country of Origin=US, Gender=Female, Glow Wire Compliant=Non-compliant, Halogen Free="Low Halogen", Housing Material=Nylon, Lead Free="Lead Free", Lifecycle Status=Production, MOUNT="Through Hole", Number of Circuits=2, Number of Contacts=2, Number of Pins=2, Number of Positions=2, Number of Rows=1, Orientation=Vertical, Packaging=Carton, Pitch=6.35mm, Plating=Tin, Plating Thickness=3.5052µm, Pricing 1="1=0,2907, 10=0,267, 100=0,245, 500=0,229, 1836=0,216 (USD)", Radiation Hardening=No, REACH SVHC=Yes, RoHS=Compliant, Schedule B="8536694040, 8536694040|8536694040|8536694040|8536694040|8536694040", Shell Material=POLYAMIDE66, Stock 1=4724, Supplier 1="Arrow Electronics", Terminal Pitch=6.35mm, Termination=Solder

## Via types
v1: diameter 0.6, hole 0.3, Top Layer to Bottom Layer, 491 vias
v2: diameter 1.27, hole 0.711, Top Layer to Bottom Layer, 4 vias

## Nets (pads, with @x,y where several pads share a name; then routed paths per layer and width w, separated by ;. In a path a pad name is that pad's centre, name@x,y a point inside that pad or via, vN(x,y) a via of type N, cw(c..) or ccw(c..) an arc to the next point about the centre after c; other vN are vias at no path point)
3V3: C16.2 C17.2 FB1.1 U3.5 | length 12.1
  Top Layer w0.5: FB1.1@86.628,38.326 FB1.1@86.499,38.354 87.708,38.354 88.089,37.973 89.089,37.973 U3.5@89.093,37.969 ; U3.5@89.093,37.802 U3.5@89.093,37.969 ; C17.2@94.488,37.249 C16.2@92.837,37.249 92.837,39.497 89.386,39.497 89.093,39.204 U3.5@89.093,37.969
4V5: C4.2 C5.2 C6.2 C7.2 C25.1 C28.1 D4.1 D5.2 D6.1 D7.2 F1.1 L1.2 R2.2 U7.1 U8.1 | length 309.1
  Top Layer w0.8: C25.1@40.894,50.165 40.894,51.653 ccw(c38.354,51.653) 40.15,53.449 27.795,65.804 ccw(c25.999,64.008) 25.999,66.548 U7.1@18.566,66.548 18.566,80.518 cw(c21.106,80.518) 21.106,83.058 D4.1@40.767,83.058 42.926,83.058 cw(c42.926,82.55) D5.2@43.434,82.55 43.815,82.931 D6.1@51.117,82.931 ; C28.1@49.911,50.292 49.911,55.566 cw(c52.451,55.566) 50.655,57.362 U8.1@59.46,66.167 59.46,79.315 ccw(c56.92,79.315) 58.716,81.111 57.912,81.915 ccw(c56.686,80.689) 56.686,82.423 D7.2@54.102,82.423 ccw(c53.594,82.423) 53.594,82.931 D6.1@51.181,82.931 ; C6.2@75.984,2.921 C5.2@75.984,1.27 75.984,1.22 76.034,1.22 76.034,0.42 76.426,0.028 78.601,0.028 78.982,0.408 78.982,1.22 C7.2@79.032,1.27 C4.2@79.032,2.921 ; R2.2@79.159,4.445 79.109,4.445 79.032,4.368 C4.2@79.032,2.921 ; v1(80.645,2.921) C4.2@79.032,2.921 ; L1.2@82.312,21.621 82.405,21.825 84.412,26.221 88.601,28.467 F1.1@89.027,28.702
  Top Layer w1: L1.2@82.296,19.685 84.296,22.596 84.598,23.257 84.963,23.622 v1(86.995,23.622)
  Bottom Layer w0.8: U8.1@59.46,66.167 56.043,66.167 cw(c56.043,68.707) 54.247,66.911 50.655,70.503 cw(c52.451,72.299) 49.911,72.299 49.911,76.418 cw(c52.451,76.418) 50.655,78.214 50.691,78.25 cw(c52.487,76.454) 52.487,78.994 53.685,78.994 ccw(c53.685,97.171) 66.538,84.318 73.787,91.567 78.196,91.567 cw(c78.196,89.027) 79.992,90.823 87.902,82.913 cw(c86.106,81.117) 88.646,81.117 88.646,80.137 v1(86.995,23.622) 89.882,19.731 ccw(c90.403,20.12) 89.958,19.646 89.959,19.645 93.513,16.328 cw(c93.069,15.853) 93.719,15.839 93.719,15.837 93.472,5.471 ccw(c94.122,5.453) 93.472,5.457 cw(c90.932,5.461) 93.472,5.454 cw(c90.932,5.461) 90.932,2.921 v1(80.645,2.921)
4V5A: C15.2 D2.1 F1.2 U3.1 U3.3 | length 12.2
  Top Layer w0.4: D2.1@86.995,32.131 87.43,32.043 88.401,32.043 F1.2@89.027,32.004 ; U3.1@89.093,35.096 89.039,34.795 89.039,32.439 F1.2@89.027,32.004 ; U3.3@90.993,35.096 cw(c90.993,35.03) 91.059,35.03 ccw(c91.926,35.03) 91.926,34.163 C15.2@92.418,34.163 92.418,32.728 91.694,32.004 F1.2@89.027,32.004
6V: C11.2 C12.2 C13.2 C14.2 C29.1 C30.1 D8.1 D9.1 D10.2 D11.2 L2.2 R5.2 U9.1 U10.1 | length 212.1
  Top Layer w0.6: C13.2@55.499,2.756 C12.2@57.15,2.756 C14.2@58.801,2.756 R5.2@60.16,2.756 ; R5.2@60.16,2.794 R5.2@60.16,2.756 ; C11.2@60.287,1.27 60.16,1.397 R5.2@60.16,2.756
  Top Layer w1: U9.1@11.303,88.392 10.846,88.849 9.585,88.849 9.292,88.556 9.243,88.507 ccw(c12.042,86.351) 8.509,86.351 8.509,86.311 D8.1@8.509,77.724 ccw(c10.013,79.228) 10.013,77.101 D10.2@11.052,77.101 13.099,75.054 cw(c11.303,73.258) 13.843,73.258 13.843,56.17 ccw(c16.383,56.17) 14.587,54.374 17.163,51.798 ccw(c18.959,53.594) 18.959,51.054 C29.1@25.273,51.054 32.222,51.054 34.018,50.31 45.339,38.989 48.731,36.632 48.786,36.594 54.376,31.004 54.417,30.904 ; L2.2@54.483,19.939 53.213,18.669 53.213,3.683 54.14,2.756 C13.2@55.499,2.756 ; L2.2@54.517,19.973 54.517,30.563 ; 54.517,30.663 54.517,47.675 57.134,50.292 C30.1@59.309,50.292 65.024,50.292 71.628,56.896 71.628,72.898 75.819,77.089 D9.1@83.312,77.089 ; U10.1@75.565,87.884 79.339,87.884 cw(c79.339,85.344) 81.135,87.14 82.568,85.707 cw(c80.772,83.911) 83.312,83.911 D9.1@83.312,77.089 ; D11.2@85.852,76.454 ccw(c84.319,74.921) 84.319,77.089 D9.1@83.312,77.089
+12: D1.1 JDC1.1 | length 7.2
  Top Layer w1: D1.1@85.725,11.176 86.032,11.483 87.429,11.483 90.551,14.605 JDC1.1@90.551,15.24
  Bottom Layer w1: JDC1.1@90.297,14.986 JDC1.1@90.551,15.24
D3V3: C18.2 C19.1 C20.2 C22.2 C31.2 C32.2 FB1.2 J1.2 J2.2 J3.1 J4.2 J5.2 JP1.2 R8.1 R9.1 R10.1 R11.1 R12.2 R13.2 R14.1 R15.1 R16.1 R17.1 R18.1 R19.1 R20.1 R21.1 R22.1 R28.2 R29.2 U4.1 U4.2 U4.3 U4.16 U6.5 U6.10 | length 367.3
  Top Layer w0.2: 5.588,29.718 5.588,32.714 5.64,32.766 U6.10@5.969,32.766 7.239,32.766 8.719,34.246 8.719,34.627 8.864,34.772 10.007,34.772 U6.5@10.033,34.798 10.453,34.798 10.505,34.85 C32.2@10.505,36.449 C31.2@10.505,37.973 ; 37.767,13.43 ccw(c37.767,14.081) 37.827,13.433
  Top Layer w0.4: 4.688,29.718 5.588,29.718 ; R13.2@25.781,12.992 25.946,12.827 26.165,12.827 30.353,12.827 30.579,12.827 ; U4.16@31.293,14.235 31.293,13.386 30.734,12.827 30.579,12.827 ; U4.3@37.033,15.535 U4.2@37.033,14.885 U4.1@37.033,14.235 38.397,12.871 ; R14.1@42.037,11.303 41.017,11.303 cw(c41.017,13.843) 39.221,12.047 38.397,12.871 ; 30.579,12.827 30.92,12.486 38.011,12.486 38.397,12.871
  Top Layer w0.6: JP1.2@2.921,26.543 1.211,26.543 0.889,26.221 ; 3.588,29.718 4.688,29.718 ; J1.2@4.736,57.142 6.925,57.142 7.112,56.955 ; J2.2@4.99,68.064 6.653,68.064 7.112,68.523 ; 5.859,16.398 7.508,16.398 9.271,18.161 R11.1@9.271,18.923 ; C22.2@7.021,21.336 1.016,21.336 0.889,21.463 ; R12.2@28.067,9.563 ccw(c25.046,9.671) 27.183,11.809 26.165,12.827 26,12.992 R13.2@25.781,12.992 ccw(c25.566,12.777) 25.566,13.081 R9.1@24.13,13.081 22.913,13.081 cw(c22.913,13.515) R10.1@22.606,13.208 cw(c22.606,14.128) 21.956,13.477 R8.1@20.828,14.605 20.678,14.605 R8.1@20.424,14.351 ; R20.1@32.131,21.336 R16.1@29.972,21.336 29.822,21.336 29.695,21.209 R17.1@27.813,21.209 27.663,21.209 27.536,21.082 R18.1@25.527,21.082 R19.1@23.114,21.082 R15.1@20.828,21.082 17.78,21.082 14.986,18.288 14.986,15.367 16.002,14.351 R8.1@20.424,14.351 ; R29.2@48.044,86.995 48.044,86.845 48.194,86.845 48.679,86.36 52.007,86.36 ; R28.2@55.334,86.36 52.007,86.36 ; C18.2@86.195,34.417 86.045,34.567 86.045,34.617 85.35,35.312 85.35,38.144 85.205,38.289 FB1.2@85.205,38.354 85.205,41.668 86.591,43.053 C19.1@87.565,43.053 ; C19.1@87.565,43.053 87.793,43.053 C19.1@88.265,43.053 88.265,52.334 88.265,52.336 cw(c95.489,52.337) 88.728,54.883 cw(c89.243,54.688) 88.757,54.946 90.061,57.388 90.157,57.518 90.432,57.793 91.93,57.793 ; J5.2@94.197,57.793 91.93,57.793 ; J4.2@94.705,69.35 v1@92.71,69.35 ; 0.889,21.463 0.889,26.221 ; 0.889,21.463 0.889,19.558 1.524,18.923 C20.2@6.312,18.923 6.312,16.885 5.842,16.415 5.842,11.303 7.112,10.033 16.106,10.033 R8.1@20.424,14.351 ; 0.889,26.221 0.889,29.718 0.889,31.981 1.143,32.235 R21.1@1.143,32.385 R22.1@1.143,34.163 1.143,40.477 1.143,42.812 2.794,44.463 2.794,50.691 2.794,50.881 2.911,51.03 cw(c3.344,50.691) 3.029,51.142 3.116,51.203 3.22,51.227 cw(c3.344,50.691) 3.267,51.236 ccw(c2.794,54.628) 5.217,52.207 7.112,54.102 7.112,56.955 ; 7.112,56.955 7.112,68.523 ; 7.112,68.523 7.112,85.308 ccw(c4.572,85.308) 6.368,87.104 5.062,88.41 ccw(c3.266,86.614) 3.266,89.154 J3.1@2.286,89.154 7.257,94.125 cw(c10.586,90.796) 10.586,95.504 48.387,95.504 52.007,91.884 ; 52.007,86.36 52.007,91.884 ; 52.007,91.884 52.197,91.694 79.629,91.694 92.71,78.613 v1@92.71,69.35 ; 91.93,57.793 91.93,68.562 v1(92.71,69.342) v1@92.71,69.35
  Top Layer w0.8: 2.288,29.718 3.588,29.718
  Top Layer w1: 0.889,29.718 2.288,29.718